# EAGLE board xbee (EAGLE 5.06)
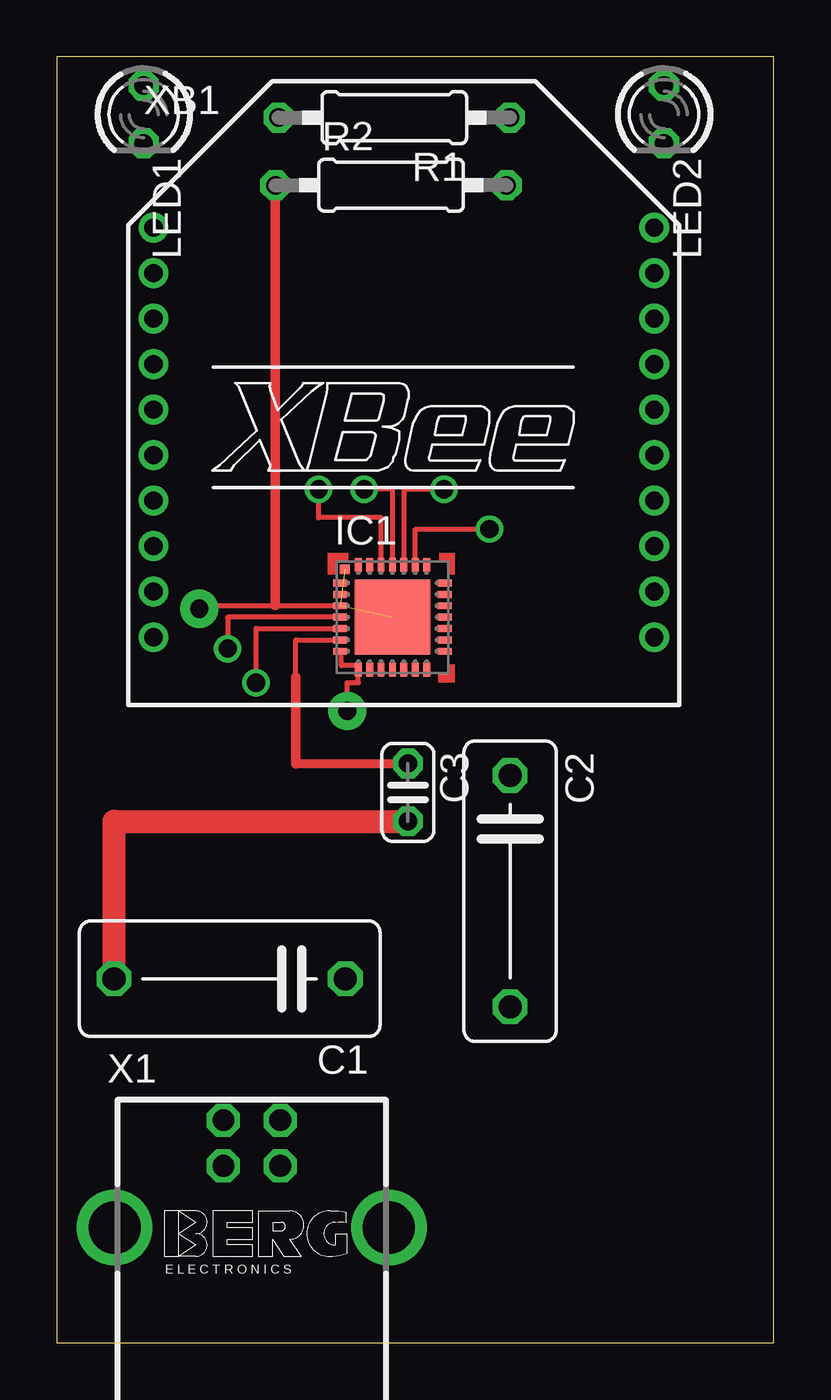
[diagram p0: board, top side]
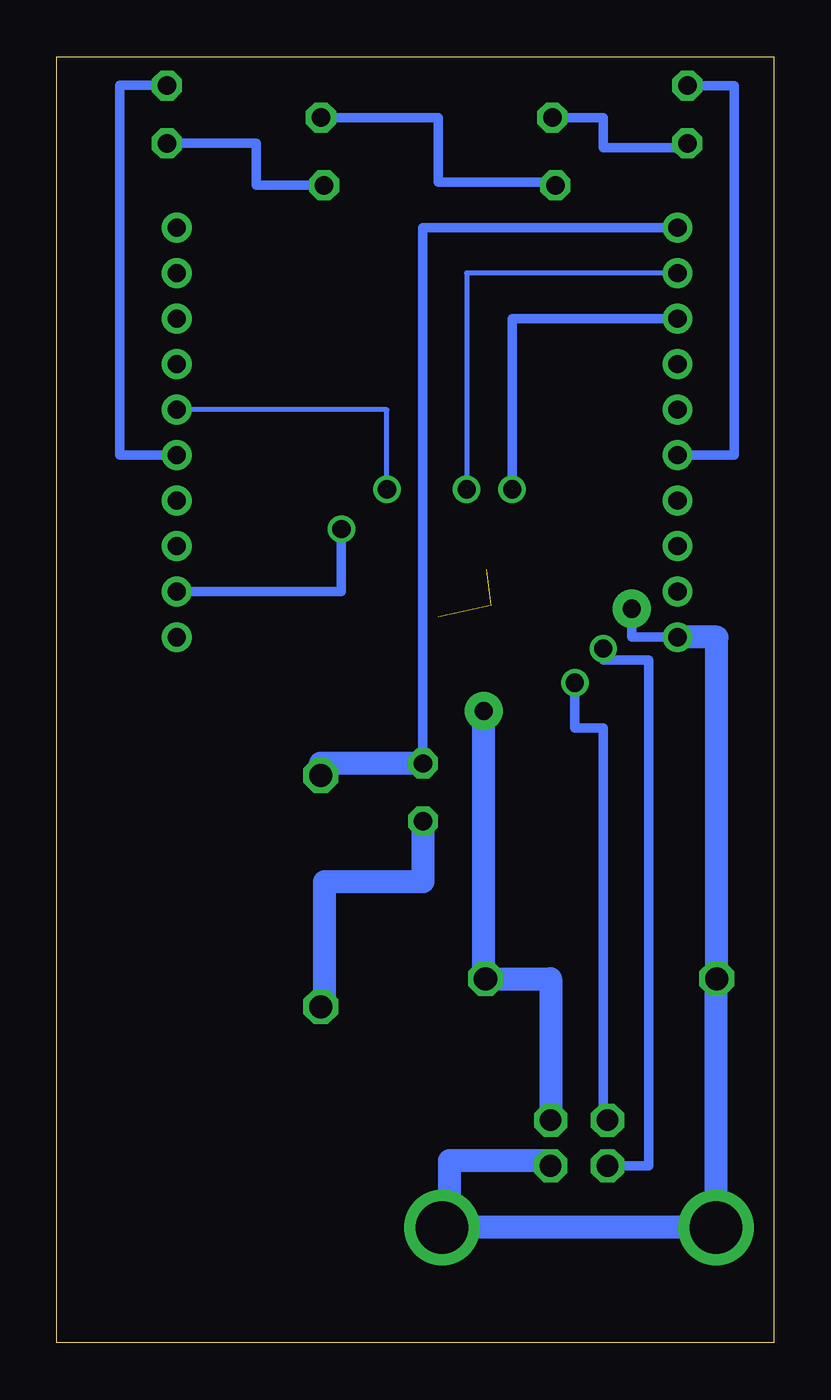
[diagram p1: board, bottom side, seen from below]

Size 31.5 x 56.5 mm. Coordinates in mm from the lower left corner, seen from the top.
Outline: 0,0 31.5,0 31.5,56.5 0,56.5 0,0
Copper layers (1*16): Top 0.035mm / dielectric 1.5mm / Bottom 0.035mm
Design rules "default *": minimum track width 10mil, minimum drill 24mil, track to track 0.5mil, track to pad 0.5mil, pad to pad 0.5mil, via to via 8mil, smd to smd 8mil, copper to edge 40mil, drill to drill 8mil, minimum pad ring 10mil, minimum via ring 8mil, stop-mask expansion 4mil, vias tented up to drill 0mil, thermal gap 10mil

## Footprints (pad centres in the part's own frame; a part is rotated, then mirrored left to right if it is on the bottom)
C102-054X133 = drill 1.016 pad 1.2 octagon: 1 -5.08,0; 2 5.08,0
C102-043X133 = drill 1.016 pad 1.2 octagon: 1 -5.08,0; 2 5.08,0
C025-024X044 = drill 0.8 pad 1.2 octagon: 1 -1.27,0; 2 1.27,0
MLP28 = smd 0.6 x 0.3: 1 -2.3,1.5; 2 -2.3,1; 3 -2.3,0.5; 4 -2.3,0; 5 -2.3,-0.5; 6 -2.3,-1; 7 -2.3,-1.5; 15 2.3,-1.5; 16 2.3,-1; 17 2.3,-0.5; 18 2.3,0; 19 2.3,0.5; 20 2.3,1; 21 2.3,1.5 | smd 0.3 x 0.6: 8 -1.5,-2.3; 9 -1,-2.3; 10 -0.5,-2.3; 11 0,-2.3; 12 0.5,-2.3; 13 1,-2.3; 14 1.5,-2.3; 22 1.5,2.3; 23 1,2.3; 24 0.5,2.3; 25 0,2.3; 26 -0.5,2.3; 27 -1,2.3; 28 -1.5,2.3 | smd 3.3 x 3.3: EXP 0,0 | smd 0.435 x 0.435: M -2.103,2.103
LED3MM = drill 0.813 octagon: A -1.27,0; K 1.27,0
0207/10 = drill 0.813 octagon: 1 -5.08,0; 2 5.08,0
PN61729-S = drill 0.95 octagon: 1 1.25,4.71; 2 -1.25,4.71; 3 -1.25,2.71; 4 1.25,2.71 | drill 2.3 pad 2.9 round: S1 -6.02,0; S2 6.02,0
XBEE = drill 0.8 pad 1.27 round: 1 -11,9; 2 -11,7; 3 -11,5; 4 -11,3; 5 -11,1; 6 -11,-1; 7 -11,-3; 8 -11,-5; 9 -11,-7; 10 -11,-9; 11 11,-9; 12 11,-7; 13 11,-5; 14 11,-3; 15 11,-1; 16 11,1; 17 11,3; 18 11,5; 19 11,7; 20 11,9

## Placement (x,y rotation side)
C1  1u  [C102-054X133]  7.59,15.99 180 top
C2  4.7u  [C102-043X133]  19.91,19.84 270 top
C3  0.1u  [C025-024X044]  15.42,24.18 270 top
IC1  CP2101  [MLP28]  14.74,31.88 0 top
LED1  [LED3MM]  3.81,53.97 270 top
LED2  [LED3MM]  26.67,53.97 270 top
R1  1k  [0207/10]  14.82,53.83 180 top
R2  1k  [0207/10]  14.68,50.86 0 top
X1  PN61729-S  [PN61729-S]  8.56,5.06 0 top
XB1  XBEE  [XBEE]  15.24,40 0 top

## Library data of the parts
C1-C3 R1 R2 = rcl
IC1 = silabs
LED1 LED2 = led
X1 = con-berg
XB1 = maxstream

## Nets
GND: C1.2 C2.2 C3.2 IC1.3 IC1.EXP IC1.M R1.1 R2.1 X1.4 X1.S1 X1.S2 XB1.10
N$1: C1.1 IC1.7 IC1.8 X1.1
N$2: IC1.25 XB1.2
N$3: C2.1 C3.1 IC1.6 XB1.1
N$5: IC1.26 XB1.3
N$6: IC1.23 XB1.12
N$7: IC1.24 XB1.16
N$8: LED2.A XB1.15
N$9: LED1.A XB1.6
N$10: LED2.K R2.2
N$11: LED1.K R1.2
N$12: IC1.4 X1.3
N$13: IC1.5 X1.2

## Tracks (layer width: path | path; a pad name or v marks a point on that pad's centre or on a via)
GND  (via drill 0.8 pad 1.68)  (2 unrouted)
  Top 0.23: v6.25,32.25 6.25,32.38 9.6,32.38 IC1.3
  Top 0.406: 9.6,32.38 R2.1
  Top 1.016: C3.2 2.51,22.91 C1.2
  Bottom 0.406: R1.1 14.75,53.83 14.75,51 9.6,51 R2.1 | XB1.10 6.25,31 v6.25,32.25
  Bottom 1.016: XB1.10 2.51,31 C1.2 2.54,15.99 X1.S1 X1.S2 14.25,5.06 14.25,8 9.81,8 X1.4 | C2.2 19.75,14.76 19.75,20.25 15.42,20.25 C3.2
N$1  (via drill 0.8 pad 1.68)
  Top 0.23: IC1.7 12.5,30.38 12.5,29.75 13.24,29.75 IC1.8 | IC1.8 | v12.75,27.75 12.75,29 13.24,29 | 13.24,29 13.25,29 | 13.24,29 IC1.8
  Bottom 1.016: v12.75,27.75 12.75,15.99 C1.1 9.81,15.99 X1.1
N$2  (via drill 0.8)
  Top 0.23: IC1.25 14.75,37.5 v13.5,37.5
  Bottom 0.23: XB1.2 13.5,47 v13.5,37.5 13.75,37.5
N$3
  Top 0.23: IC1.6 10.5,30.88 10.5,29.25
  Top 0.406: C3.1 10.5,25.42 10.5,29.25
  Bottom 0.406: XB1.1 15.42,49 C3.1
  Bottom 1.016: C3.1 19.91,25.45 C2.1
N$5  (1 unrouted)
  Top 0.23: IC1.26 14.25,36.25 11.5,36.25 11.5,37.5
  Bottom 0.406: XB1.3 11.5,45 11.5,37.5
N$6  (via drill 0.8)
  Top 0.23: IC1.23 15.75,35.75 v19,35.75
  Bottom 0.406: XB1.12 19,33 v19,35.75
N$7  (via drill 0.8)  (1 unrouted)
  Top 0.23: IC1.24 15.25,37.5 v17,37.5
  Bottom 0.23: XB1.16 17,41 v17,37.5
N$8
  Bottom 0.406: XB1.15 28.75,39 28.75,55.25 LED2.A
N$9
  Bottom 0.406: LED1.A 1.75,55.24 1.75,39 XB1.6
N$10
  Bottom 0.406: LED2.K 22.75,52.7 22.75,50.86 R2.2
N$11
  Bottom 0.406: R1.2 7.5,53.83 7.5,52.5 3.81,52.5 LED1.K
N$12  (via drill 0.8)
  Top 0.23: IC1.4 7.5,31.88 v7.5,30.5
  Bottom 0.406: X1.3 5.5,7.77 5.5,30 7.5,30 v7.5,30.5
N$13  (1 unrouted)
  Top 0.23: IC1.5 8.75,31.38 8.75,29
  Bottom 0.406: X1.2 7.5,9.77 7.5,27 8.75,27 8.75,29
N$18  (1 unrouted)
N$24  (via drill 0.8)
  other vias: 8.75,29
N$25  (via drill 0.8)
  other vias: 11.5,37.5
(copper drawn outside any net)
  shapes: Top area x6